# Altium PCB PCB1.PcbDoc
Units mm, origin at the board's own origin, x right, y up, seen from the top; angles counter-clockwise.
Board outline 83.57 x 47.5 mm, 2 copper layers (Top Layer, Bottom Layer); 97 components, 61 nets, 288 pads, 265 vias.
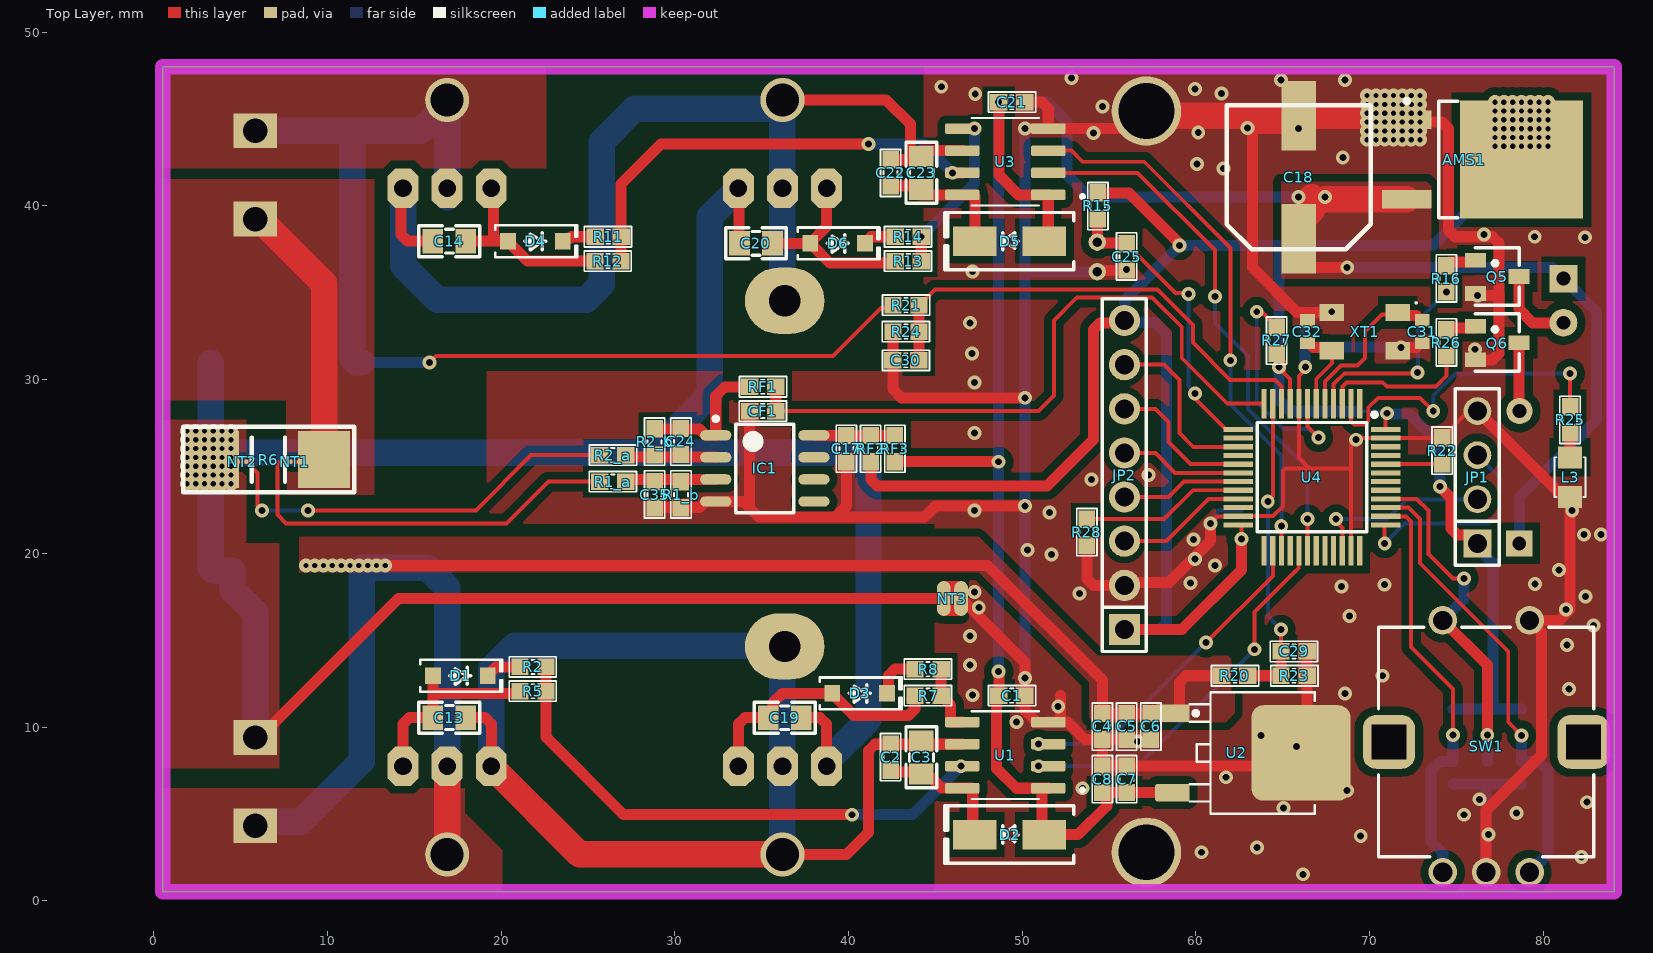
[diagram p0: Top Layer view]
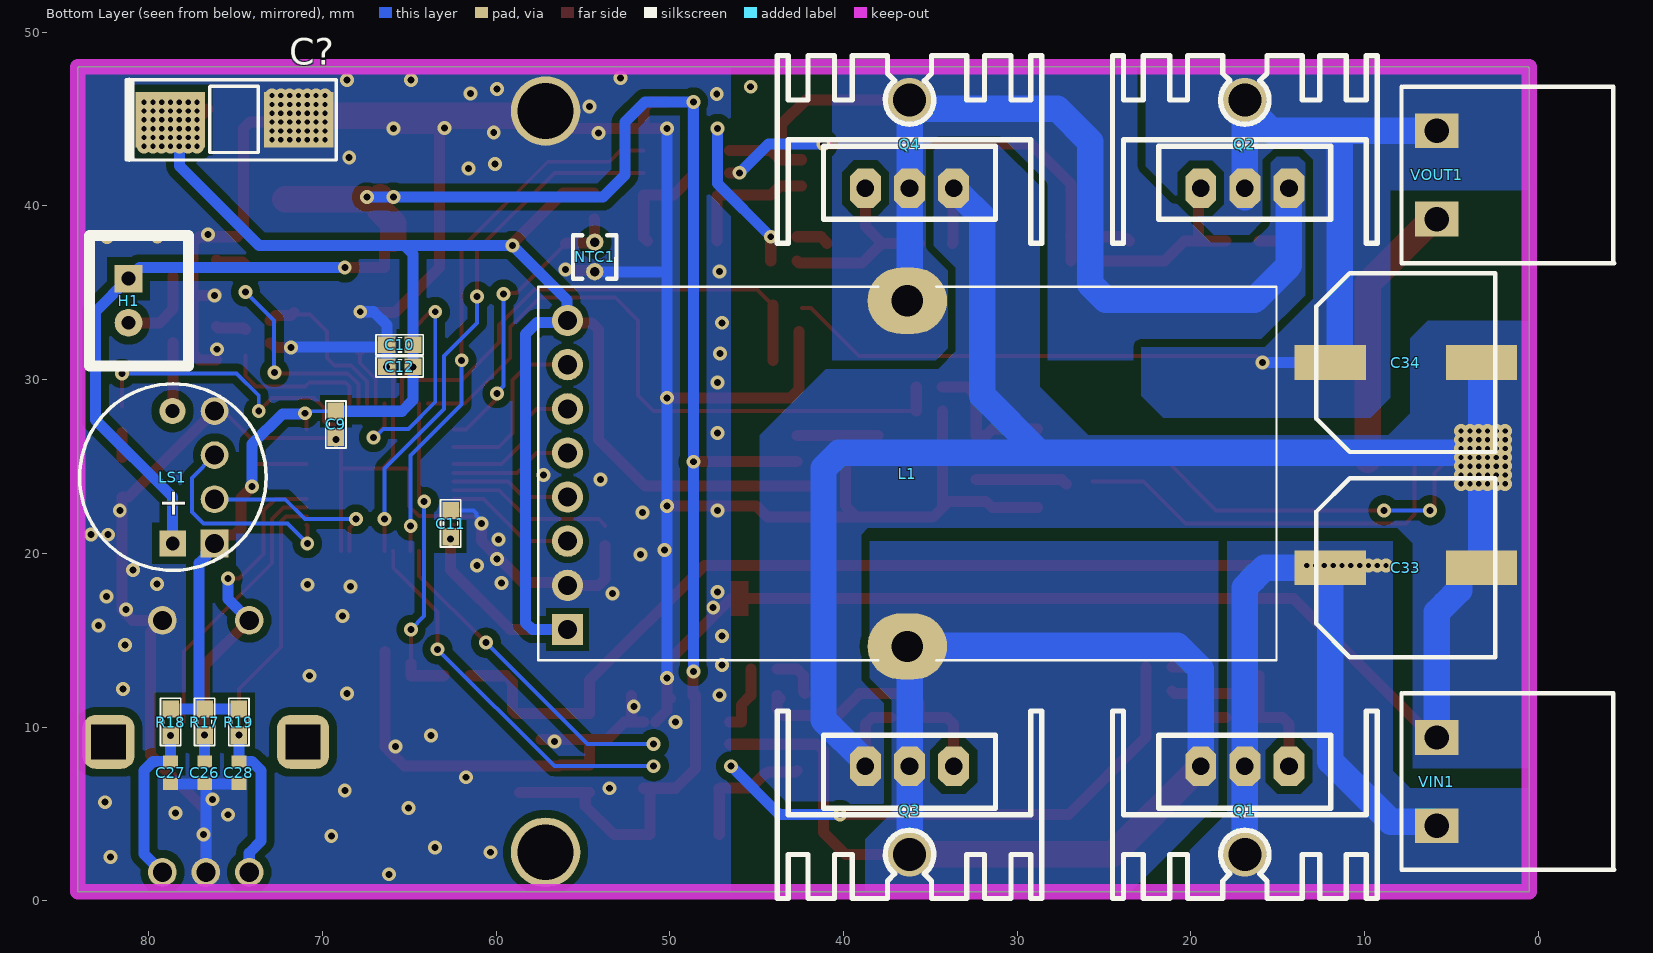
[diagram p1: Bottom Layer view, seen from below]

## Layer stack, top to bottom
Top Solder: solder mask 0.0102, Solder Resist, Dk 3.5
Top Layer: signal copper 0.0356
Dielectric 1: dielectric 0.32, FR-4, Dk 4.8
Bottom Layer: signal copper 0.0356
Bottom Solder: solder mask 0.0102, Solder Resist, Dk 3.5

## Board outline
0.508,0.508 0.508,48.006 84.074,48.006 84.074,0.508

## Design rules (kind name [scope] priority, off if disabled: settings)
Clearance [All] p1: gap=0.203 ignorepadtopadclearanceinfootprint=FALSE
PlaneConnect [All] p1: planeconnectstyle=Direct reliefexpansion=0.508 reliefentries=4 reliefconductorwidth=0.254 reliefairgap=0.254
PolygonConnect [All] p1: connectstyle=Direct reliefconductorwidth=0.254 reliefentries=4 polygonreliefangle="90 Angle" airgapwidth=0.254
RoomDefinition Sheet2 [InComponentClass('Sheet2')] p1: confinementstyle=ConfineIn formatcopy=TRUE lockcomponents=FALSE outline -57.785,-160.655 -6.985,-160.655 -6.985,-135.255 -57.785,-135.255
RoutingVias [All] p1: holewidth=0.4 width=0.8 viastyle="Through Hole" minholewidth=0.4 minwidth=0.8 maxholewidth=0.4 maxwidth=0.8
SolderMaskExpansion [All] p1: expansion=0.102 istentingtop=FALSE
Width [All] p1: maxlimit=1.524 minlimit=0.229 preferedwidth=0.635
29 further rules are at their usual default settings.

## Components (designator, comment, footprint, x,y, rotation, side; value= is the part's Value field where it differs from the comment)
AMS1 "AMS1117" "TO 252" 70.456,39.081 r0 top
C1 "104" "tu 0603" 49.403,11.811 r0 top
C2 "104" "tu 0603" 42.418,8.255 r90 top
C3 "104" "tu 0805" 44.196,8.255 r270 top
C4 "104" "tu 0603" 54.61,10.033 r270 top
C5 "104" "tu 0603" 56.007,10.033 r270 top
C6 "104" "tu 0603" 57.404,10.033 r270 top
C7 "104" "tu 0603" 56.007,6.985 r90 top
C8 "104" "tu 0603" 54.61,6.985 r90 top
C9 "104" "tu 0603" 69.215,27.432 r270 bottom
C10 "104" "tu 0603" 65.532,32.004 r0 bottom
C11 "104" "tu 0603" 62.611,21.717 r90 bottom
C12 "104" "tu 0603" 65.532,30.734 r0 bottom
C13 "100" "tu 0805" 17.018,10.541 r180 top
C14 "100" "tu 0805" 17.018,37.97 r180 top
C17 "104" "tu 0603" 39.878,26.035 r270 top
C18 "100uF" "tu nhom 8 (f)" 65.913,41.656 r90 top
C19 "100" "tu 0805" 36.322,10.541 r0 top
C20 "100" "tu 0805" 34.671,37.846 r180 top
C21 "104" "tu 0603" 49.403,45.974 r0 top
C22 "104" "tu 0603" 42.418,41.91 r270 top
C23 "104" "tu 0805" 44.196,41.91 r270 top
C24 "100" "tu 0603" 30.353,26.441 r270 top
C25 "102" "tu 0603" 56.007,37.084 r90 top
C26 "0.1uF" CAPC1608X09L 76.772,7.366 r90 bottom
C27 "0.1uF" CAPC1608X09L 78.74,7.366 r90 bottom
C28 "0.1uF" CAPC1608X09L 74.803,7.366 r90 bottom
C29 "102" "tu 0603" 65.647,14.351 r180 top
C30 "102" "tu 0603" 43.295,31.115 r0 top
C31 "10pF" CAPC1608X09L 73.025,32.766 r90 top
C32 "10pF" CAPC1608X09L 66.421,32.766 r270 top
C33 "1000uF" "tu nhom 10 (G)" 7.62,19.177 r180 bottom
C34 "1000uF" "tu nhom 10 (G)" 7.62,30.988 r180 bottom
C35 "100" "tu 0603" 28.829,23.38 r90 top
C? "47uF" "tu tantalum smd7343" 75.057,44.958 r180 bottom
CF1 "104" "tu 0603" 35.052,28.194 r0 top
D1 "S4" "DIODE SOD-123" 17.653,12.954 r0 top
D2 "SS34" "DIODE SMA" 49.276,3.81 r180 top
D3 "S4" "DIODE SOD-123" 40.64,11.938 r0 top
D4 "S4" "DIODE SOD-123" 21.971,37.973 r0 top
D5 "SS34" "DIODE SMA" 49.276,37.973 r180 top
D6 "S4" "DIODE SOD-123" 39.37,37.846 r0 top
H1 "FAN" XH2.54M-2 81.153,35.814 r270 bottom
IC1 "LM358 SOP8" "SOP 8" 35.179,24.892 r0 top
JP1 "debug" "JP 1x4 DT" 76.2,20.574 r90 top
JP2 "lcd_1.8 inch" "JP 1x8 DT" 55.88,15.621 r90 top
L1 "ATCA-08-251M-V" IND_ATCA-08-251M-V 36.322,24.594 r90 bottom locked
L3 "LED 0805" LED-0805-Red 81.534,25.527 r270 top
LS1 "Coi Chip Speaker" "Coi Chip Speacker" 78.613,20.574 r90 bottom
NT1 "0.25mm" NetTie_0.25mm 8.374,25.273 r180 top net-tie
NT2 "0.25mm" NetTie_0.25mm 4.834,25.273 r0 top net-tie
NT3 "NetTie_2mm" NetTie_2mm 45.482,17.399 r0 top net-tie
NTC1 "10k" MF52 54.356,37.084 r90 bottom
Q1 "IRFZ44" QTO-220H3 14.351,7.747 r0 bottom locked
Q2 "IRFZ44" QTO-220H3 19.431,41.021 r180 bottom
Q3 "IRFZ44" QTO-220H3 33.655,7.747 r0 bottom locked
Q4 "IRFZ44" QTO-220H3 38.735,41.021 r180 bottom
Q5 "HF" SOT-23 77.343,35.941 r270 top value=C9014
Q6 "HF" SOT-23 77.343,32.131 r270 top value=C9014
R1_a "10K" "Tro smd 0603" 26.416,24.13 r0 top
R1_b "30K" "Tro smd 0603" 30.353,23.38 r90 top
R2 "2.2R" "Tro smd 0603" 21.832,13.462 r180 top
R2_a "10K" "Tro smd 0603" 26.428,25.654 r0 top
R2_b "30K" "Tro smd 0603" 28.829,26.416 r90 top
R5 "10R" "Tro smd 0603" 21.832,12.065 r180 top
R6 "0.01R" "tro smd 2512" 6.604,25.4 r0 top
R7 "10R" "Tro smd 0603" 44.577,11.811 r180 top
R8 "2.2R" "Tro smd 0603" 44.577,13.335 r180 top
R11 "2.2R" "Tro smd 0603" 26.162,38.227 r180 top
R12 "10R" "Tro smd 0603" 26.15,36.83 r180 top
R13 "10R" "Tro smd 0603" 43.434,36.83 r180 top
R14 "2.2R" "Tro smd 0603" 43.434,38.227 r180 top
R15 "10k" "tro smd 0603" 54.356,40.005 r270 top
R16 "4.7K" "Tro smd 0603" 74.422,35.814 r90 top
R17 "10k" "Tro smd 0603" 76.772,10.287 r90 bottom
R18 "10k" "Tro smd 0603" 78.74,10.287 r90 bottom
R19 "10k" "Tro smd 0603" 74.803,10.287 r90 bottom
R20 "10k" "tro smd 0603" 62.242,12.954 r0 top
R21 "10k" "tro smd 0603" 43.307,34.29 r0 top
R22 "10k" "Tro smd 0603" 74.168,25.896 r90 top
R23 "100k" "tro smd 0603" 65.647,12.954 r0 top
R24 "100k" "tro smd 0603" 43.307,32.766 r180 top
R25 "10k" "Tro smd 0603" 81.534,27.698 r270 top
R26 "4.7K" "Tro smd 0603" 74.422,32.131 r90 top
R27 "10k" "Tro smd 0603" 64.643,32.258 r270 top
R28 "10k" "Tro smd 0603" 53.721,21.209 r90 top
RF1 "10K" "Tro smd 0603" 35.064,29.591 r0 top
RF2 "0R" "Tro smd 0603" 41.275,26.035 r270 top
RF3 "0R" "Tro smd 0603" 42.672,26.035 r270 top
SW1 "482024764004" 482024764004 76.708,9.144 r270 top locked
U1 "IR2101S" SOIC127P600X175-8N 49.022,8.382 r180 top
U2 "78M12 SMD TO252" TO252 62.34,8.509 r270 top
U3 "IR2101S" SOIC127P600X175-8N 49.022,42.545 r180 top
U4 "STM32F103C8T6" LQFP-48_19.6_393_58X11_SMD 66.675,24.384 r270 top
VIN1 "CON 2 EDG5.08" "CON 2 2EDG5.08" 5.842,9.398 r270 bottom
VOUT1 "CON 2 EDG5.08" "CON 2 2EDG5.08" 5.842,44.323 r270 bottom
XT1 "8 MHz" DFN220P320X110-4N 69.723,32.766 r180 top

## Footprints (in the part's own frame and the unit in brackets; to place one, negate y for a bottom-side part, rotate by r counter-clockwise, add the part's x,y. Pads: shape width x height; smd on the part's side, far side on the other; paste and mask are expansions set on the pad)
482024764004 [mm]
  round 1.65 hole 1.1: 1(-7,-2.5) 2(-7,2.5) A(7.5,-2.5) B(7.5,2.5) C(7.5,0)
  rrect50% 3.1x3 hole 2 square: S1(0,5.6) S2(0,-5.6)
  silkscreen extent -6.6,-6.2 6.6,6.2, body extent -7.32,-6.81 7.8,6.81, height 20.1
CAPC1608X09L [mm]
  rect 0.7x0.85 smd: 1(-0.65,0) 2(0.65,0)
  body extent -0.85,-0.45 0.85,0.45, height 0.9
"Coi Chip Speacker" [mm]
  rect 1.5x1.5 hole 0.8: 1(0,0)
  round 1.5 hole 0.8: 2(7.62,0.013)
  silkscreen extent -1.55,-5.38 9.18,5.36, body extent -2.22,-6 13.24,6, height 4.5
"CON 2 2EDG5.08" [mm]
  rect 2x2.5 hole 1.4: 1(0,0) 2(5.08,0)
  silkscreen extent -2.54,-2.03 7.62,10.21, body extent -2.5,-1.75 7.58,10.25, height 3.15
DFN220P320X110-4N [mm]
  rect 1.4x1 smd: 1(-1.9,-1.1) 3(1.9,1.1) G(-1.9,1.1) G(1.9,-1.1)
  silkscreen extent -3,-1.7 -2.9,-1.6, body extent -2.55,-1.65 2.55,1.65, height 1.1
"DIODE SMA" [mm] "SMA"
  rect 2.5x1.7 smd: 1(-2,0) 2(2,0)
  silkscreen extent -3.68,-1.65 3.75,1.65, body extent -2.6,-1.37 2.6,1.37, height 2.4
"DIODE SOD-123" [mm] "SOD-123"
  rect 0.9x0.95 smd: 1(-1.575,0) 2(1.575,0)
  silkscreen extent -2.3,-0.92 2.41,0.92, body extent -1.86,-0.78 1.86,0.77, height 1.35
IND_ATCA-08-251M-V [mm]
  oval 3.81x4.572 hole 1.8: 1(-9.95,0) 2(9.95,0)
  silkscreen extent -10.75,-21.25 10.75,21.25, body extent -21.45,-10.75 21.45,10.75, height 21.45
"JP 1x4 DT" [mm] "4 pins, 1 row, straight, gold plating"
  rect 1.6x1.6 hole 1.1: 1(0,0)
  round 1.6 hole 1.1: 2(2.54,0) 3(5.08,0) 4(7.62,0)
  silkscreen extent -1.27,-1.27 8.89,1.27, body extent -1.27,-1.27 8.89,1.27, height 8.54
"JP 1x8 DT" [mm] "8 pins, 1 row, straight, gold plating"
  rect 1.8x1.8 hole 1.1: 1(0,0)
  round 1.8 hole 1.1: 2(2.54,0) 3(5.08,0) 4(7.62,0) 5(10.16,0) 6(12.7,0) 7(15.24,0) 8(17.78,0)
  silkscreen extent -1.27,-1.27 19.05,1.27, body extent -1.27,-1.27 19.05,1.27, height 8.54
LED-0805-Red [mil]
  rect 50x55 smd: 1(0,0) 2(90,0)
  silkscreen extent 0,-35 90,35, body extent 5,-25 85,25, height 43
LQFP-48_19.6_393_58X11_SMD [mm] "48LQFP"
  rect 1.7x0.3 smd mask+0.076: 1(-4.238,2.75) 2(-4.238,2.25) 3(-4.238,1.75) 4(-4.238,1.25) 5(-4.238,0.75) 6(-4.238,0.25) 7(-4.238,-0.25) 8(-4.238,-0.75) 9(-4.238,-1.25) 10(-4.238,-1.75) 11(-4.238,-2.25) 12(-4.238,-2.75) 25(4.238,-2.75) 26(4.238,-2.25) 27(4.238,-1.75) 28(4.238,-1.25) 29(4.238,-0.75) 30(4.238,-0.25) 31(4.238,0.25) 32(4.238,0.75) 33(4.238,1.25) 34(4.238,1.75) 35(4.238,2.25) 36(4.238,2.75)
  rect 0.3x1.7 smd mask+0.076: 13(-2.75,-4.238) 14(-2.25,-4.238) 15(-1.75,-4.238) 16(-1.25,-4.238) 17(-0.75,-4.238) 18(-0.25,-4.238) 19(0.25,-4.238) 20(0.75,-4.238) 21(1.25,-4.238) 22(1.75,-4.238) 23(2.25,-4.238) 24(2.75,-4.238) 37(2.75,4.238) 38(2.25,4.238) 39(1.75,4.238) 40(1.25,4.238) 41(0.75,4.238) 42(0.25,4.238) 43(-0.25,4.238) 44(-0.75,4.238) 45(-1.25,4.238) 46(-1.75,4.238) 47(-2.25,4.238) 48(-2.75,4.238)
  silkscreen extent -3.72,-3.15 3.15,3.73, body extent -4.5,-4.5 4.5,4.5, height 1.7
MF52 [mm]
  round 1 hole 0.55: 1(-0.869,-0.039) 2(0.831,-0.039)
  silkscreen extent -1.27,-1.29 1.23,1.21, body extent -1.24,-1.24 1.26,2.56, height 5.45
NetTie_0.25mm [mm]
  round 0.25 smd paste-2 mask+0.102: 1(0,0) 2(0.5,0)
  Top Layer region: 0,0.125 0.5,0.125 0.5,-0.125 0,-0.125
NetTie_2mm [mm]
  oval 0.8x2 smd paste-2 mask+0.102: 1(0,0) 2(1,0)
  Top Layer region: 0,1 1,1 1,-1 0,-1
QTO-220H3 [mil] "TO-220 1-2-3"
  oct 70x90 hole 40: 1(0,0) 2(100,0) 3(200,0)
  round 100 hole 75: 2(100,200)
  silkscreen extent -200,-125 400,300, body extent -190,-102 392,323, height 984
SOIC127P600X175-8N [mm]
  rrect25% 1.97x0.6 smd: 1(-2.475,1.905) 2(-2.475,0.635) 3(-2.475,-0.635) 4(-2.475,-1.905) 5(2.475,-1.905) 6(2.475,-0.635) 7(2.475,0.635) 8(2.475,1.905)
  silkscreen extent -4.54,-2.52 1.95,2.53, body extent -3,-2.5 3,2.5, height 1.75
"SOP 8" [mm] "SOIC, 8-Leads, Body 4.9x3.9mm, Pitch 1.27mm, IPC High Density"
  oval 1.8x0.6 smd: 1(-2.825,1.905) 2(-2.825,0.635) 3(-2.825,-0.635) 4(-2.825,-1.905) 5(2.825,-1.905) 6(2.825,-0.635) 7(2.825,0.635) 8(2.825,1.905)
  silkscreen extent -2.95,-2.55 1.68,2.98, body extent -2.99,-2.45 3,2.45, height 1.6
SOT-23 [mm] "SOT 23 _ 1-3-2"
  rect 0.85x1.2 smd: 1(-0.94,-1.245) 2(0.985,-1.25) 3(0.005,1.25)
  silkscreen extent -1.65,-1.27 1.65,1.27, body extent -1.47,-1.33 1.53,1.17, height 1.06
TO252 [mm] "TO252"
  round 0.5 on Mech15: 0(0,0)
  rrect25% 1x2 smd: 1(-2.285,-3.7) 3(2.285,-3.7)
  rrect25% 5.5x5.7 smd: 2(0,3.7)
  silkscreen extent -3.5,-2.7 3.5,4.5, body extent -3.3,-3.95 3.3,5.76, height 2.31
"TO 252" [mm]
  rect 2.85x1.05 smd: 1(1.684,5.881) 3(1.684,1.301)
  rect 7.1x6.8 smd: 2(8.284,3.591)
  silkscreen extent 1.56,0.24 4.61,7.08, body extent 1.25,0.35 10.92,6.89, height 2.29
"Tro smd 0603" [mm] "Chip Capacitor, 2-Leads, Body 1,60x0,80mm, IPC Medium Density"
  rect 1x0.95 smd mask+0.076: 1(-0.75,0) 2(0.75,0)
  silkscreen extent -1.35,-0.58 1.37,0.58, body extent -0.82,-0.42 0.82,0.43, height 0.44
"tro smd 0603" [mm] "Chip Capacitor, 2-Leads, Body 1,60x0,80mm, IPC Medium Density"
  rect 1x0.95 smd mask+0.076: 1(-0.75,0) 2(0.75,0)
  silkscreen extent -1.35,-0.58 1.37,0.58, body extent -0.82,-0.42 0.82,0.43, height 0.44
"tro smd 2512" [mm]
  rect 3x3.3 smd: 1(-3.2,0) 2(3.2,0)
  silkscreen extent -4.9,-1.88 4.93,1.88, body extent -3.12,-1.57 3.18,1.58, height 0.82
"tu 0603" [mm] "Chip Capacitor, 2-Leads, Body 1,60x0,80mm, IPC Medium Density"
  rect 1x0.95 smd mask+0.076: 1(-0.75,0) 2(0.75,0)
  silkscreen extent -1.35,-0.58 1.37,0.58, body extent -0.8,-0.4 0.8,0.4, height 0.9
"tu 0805" [mm] "Compoment SMD 80x50mil"
  rect 1.2x1.4 smd: 1(-0.946,-0.003) 2(0.954,-0.003)
  silkscreen extent -1.75,-0.89 1.75,0.89, body extent -1.01,-0.64 1.01,0.63, height 0.61
"tu nhom 8 (f)" [mm]
  rect 4x2 smd: 1(-3.55,0) 2(3.55,0)
  silkscreen extent -4.15,-4.15 4.15,4.15, body extent -4.85,-4.25 4.85,4.25, height 10.5
"tu nhom 10 (G)" [mm]
  rect 4.1x2 smd: 1(-4.35,0) 2(4.35,0)
  silkscreen extent -5.15,-5.15 5.15,5.15, body extent -5.9,-5.25 5.9,5.25, height 10.5
"tu tantalum smd7343" [mm]
  rect 4x3.2 smd: 1(-3.7,0) 2(3.7,0)
  silkscreen extent -6.23,-2.31 5.85,2.31, body extent -3.75,-2.33 3.85,2.27, height 3.99
XH2.54M-2 [mm]
  rect 1.6x1.6 hole 0.8: 1(0,0)
  round 1.6 hole 0.8: 2(2.54,0)
  silkscreen extent -2.48,-2.26 5.02,3.46, body extent -2.48,-2.26 5.02,3.48, height 6.91

## Part data
C1 C2 C4 C5 C6 C7 C8 C9 C10 C11 C12 C21 C22: library part "Tu 0603 101 50V 10%", "Dán", Chung_Loai=Dán, Don_Vi=Con, Ma_Hang=MH004565, So_Chan=2, Ten_Linh_Kien="Tụ 0603 101-0.1nF 10% 50V"
C3 C23: library part "Tu 0805 101 50V 20%", "Dán", Chung_Loai=Dán, Don_Vi=Con, Ma_Hang=MH002806, So_Chan=2, Ten_Linh_Kien="Tụ 0805 101-0.1nF 50V 20%"
C13 C14 C19 C20: library part "Tu 0805 104 50V 10%", "Dán", Chung_Loai=Dán, Don_Vi=Con, Ma_Hang=MH004551, So_Chan=2, Ten_Linh_Kien="Tụ 0805 104-100nF 10% 50V"
C17 C24 C35 CF1: library part "Tu 0603 106 16V 20%", "Dán", Chung_Loai=Dán, Don_Vi=Con, Ma_Hang=MH004848, So_Chan=2, Ten_Linh_Kien="Tụ 0603-10uF 20% 16V"
C18: library part "Tu Nhom 100uF 50V", "Dán", Chung_Loai=Dán, Don_Vi=Con, Ma_Hang=MH002223, So_Chan=2, Ten_Linh_Kien="Tụ Nhôm 100uF 50V 8x10.2MM"
C25 C29 C30: library part "Tu 0603 104 50V 10%", "Dán", Chung_Loai=Dán, Don_Vi=Con, Ma_Hang=MH004568, So_Chan=2, Ten_Linh_Kien="Tụ 0603 104-100nF 10% 50V"
C26 C27 C28: library part GRM188R71H104KA93D, "CAP CER 0.1UF 50V X7R 0603", Manufacturer="Murata Electronics North America", Operating Temperature="-55°C ~ 125°C", Package / Case="0603 (1608 Metric)", Ratings=-, Supplier Part Number 1=490-1519-2-ND, Temperature Coefficient=X7R, Tolerance=±10%, Voltage - Rated=50V, Applications="General Purpose", Capacitance=0.1uF, Category=Capacitors, ComponentLink1Description=http://www.murata.com/~/media/webrenewal/support/library/catalog/products/capacitor/mlcc/c02e.ashx?la=en-us, ComponentLink1URL=http://www.murata.com/~/media/webrenewal/support/library/catalog/products/capacitor/mlcc/c02e.ashx?la=en-us, Features=-, Height - Seated (Max)=-, Lead Spacing=-, Lead Style=-, Manufacturer Part Number=GRM188R71H104KA93D, Mounting Type="Surface Mount, MLCC", Packaging="Tape & Reel (TR)", Part Status=Active, Pricing 1="4000=0.01822, 8000=0.01663, 12000=0.01584 (USD)", Pricing 2="1=0.12, 10=0.084, 100=0.0396, 500=0.02778, 1000=0.023 (USD)", RoHS="RoHS Compliant", Size / Dimension="0.063\" L x 0.032\" W (1.60mm x 0.80mm)", Stock=19812000, Supplier 1=Digi-Key, Supplier 2=Digi-Key, Supplier Part Number 2=490-1519-1-ND, Thickness (Max)="0.035\" (0.90mm)"
C31 C32: library part GRM188R71H104KA93D, "CAP CER 0.1UF 50V X7R 0603", Capacitance=0.1uF, Manufacturer="Murata Electronics North America", Operating Temperature="-55°C ~ 125°C", Package / Case="0603 (1608 Metric)", Ratings=-, Supplier Part Number 1=490-1519-2-ND, Temperature Coefficient=X7R, Tolerance=±10%, Voltage - Rated=50V, Applications="General Purpose", Category=Capacitors, ComponentLink1Description=http://www.murata.com/~/media/webrenewal/support/library/catalog/products/capacitor/mlcc/c02e.ashx?la=en-us, ComponentLink1URL=http://www.murata.com/~/media/webrenewal/support/library/catalog/products/capacitor/mlcc/c02e.ashx?la=en-us, Features=-, Height - Seated (Max)=-, Lead Spacing=-, Lead Style=-, Manufacturer Part Number=GRM188R71H104KA93D, Mounting Type="Surface Mount, MLCC", Packaging="Tape & Reel (TR)", Part Status=Active, Pricing 1="4000=0.01822, 8000=0.01663, 12000=0.01584 (USD)", Pricing 2="1=0.12, 10=0.084, 100=0.0396, 500=0.02778, 1000=0.023 (USD)", RoHS="RoHS Compliant", Size / Dimension="0.063\" L x 0.032\" W (1.60mm x 0.80mm)", Stock=19812000, Supplier 1=Digi-Key, Supplier 2=Digi-Key, Supplier Part Number 2=490-1519-1-ND, Thickness (Max)="0.035\" (0.90mm)"
C33 C34: library part "Tu Nhom 1000uF 10V", "Dán", Chung_Loai=Dán, Don_Vi=Con, Ma_Hang=MH007515, So_Chan=2, Ten_Linh_Kien="Tụ Nhôm 1000uF 10V"
C?: library part "Tu tantalum 47uF 25V SMD7343", "Dán", Chung_Loai=Dán, Don_Vi=Con, Ma_Hang=MH002162, So_Chan=2, Ten_Linh_Kien="Tụ tantalum 476E-47uF 25V SMD7343"
D1 D3 D4 D6: library part "Diode S4", "Dán", Chung_Loai=Dán, Don_Vi=Con, Ma_Hang=MH005519, Ten_Linh_Kien="Diode S4 SOD123 ( 1N5819 SOD123)"
D2 D5: library part "Diode SS34 ( 1N5822 )", "Dán", Chung_Loai=Dán, Don_Vi=Con, Ma_Hang=MH002104, Ten_Linh_Kien="Diode SS34 3A 40V SMA ( 1N5822 SS34A)"
H1: library part "Header 2P 2.54 Duc Thang", "Cắm", Chung_Loai=Cắm, Don_Vi=Con, Ma_Hang=MH001283, Ten_Linh_Kien="Header 2P XH2.54-2P Đực Thẳng"
IC1: "Dán", Chung_Loai=Dán, Don_Vi=Con, Ma_Hang=MH000609, Ten_Linh_Kien="LM358 SOP8"
JP1: library part "JP 1x4 2.54 Duc Thang", "Cắm", Chung_Loai=Cắm, Don_Vi=Con, Ma_Hang=MH000903, Ten_Linh_Kien="Jump Đơn Đực 2.54MM 1x40P Thẳng 11MM"
JP2: library part "JP 1x8 2.54 Duc Thang", "Cắm", Chung_Loai=Cắm, Don_Vi=Con, Ma_Hang=MH000903, Ten_Linh_Kien="Jump Đơn Đực 2.54MM 1x40P Thẳng 11MM"
L1: "250 ÂµH Unshielded Toroidal Inductor 10 A 27mOhm Max Radial, Vertical (Open)", Package=Package, Check_prices=https://www.snapeda.com/parts/ATCA-08-251M-V/Abracon/view-part/?ref=eda, MF="Abracon LLC", MP=ATCA-08-251M-V, SnapEDA_Link=https://www.snapeda.com/parts/ATCA-08-251M-V/Abracon/view-part/?ref=snap
L3: library part "LED 0805 Do", "Dán", Chung_Loai=Dán, Don_Vi=Con, Ma_Hang=MH000897, Ten_Linh_Kien="LED 0805 Màu Đỏ (Red)"
LS1: "Còi chip"
NT1 NT2: library part NetTie_0.25mm
NTC1: library part NCP15XH103F03RC, "THERMISTOR 10K OHM NTC 0402 SMD"
Q1 Q2 Q3 Q4: "HEXFET N-Channel Power MOSFET"
Q5 Q6: library part "Trans C1815 HF SMD", "SOT-23"
R1_a R1_b R2 R2_a R2_b R5 R7 R8 R11 R12 R13 R14 R16 R17 R18 R19 R22 R25 R26 R27 R28 RF1 RF2 RF3: library part "Tro 0603 5% 10R", "Dán", Chung_Loai=Dán, Don_Vi=Con, Ma_Hang=MH006317, So_Chan=2, Ten_Linh_Kien="Trở 0603 5% 10R"
R6: library part "Tro 2512 1% 0.01R", "Dán", Chung_Loai=Dán, Don_Vi=Con, Ma_Hang=MH004912, So_Chan=2, Ten_Linh_Kien="Trở 2512 1% R010-0.01R 1W"
R15 R20 R21 R23 R24: library part "Tro 0603 5% 10k", "Dán", Chung_Loai=Dán, Don_Vi=Con, Ma_Hang=MH006316, So_Chan=2, Ten_Linh_Kien="Trở 0603 5% 10k"
SW1: "WS-ENTV Mechanical Incremental Encoder Switch, Plastic Shaft without bushing, 24Pulse/360°, 24positi", Insulation Resistance=100MΩ, Manufacturer="Wurth Elektronik", Operating Temperature Max=85°C, Operating Temperature Min=-40°C, Rated Current=10mA, Category="Encoder Switches", ComponentLink1Description="Website Link", ComponentLink1URL=https://www.we-online.com/redexpert/article/482024764004?ad, ComponentLink2Description="Datasheet Link", ComponentLink2URL=https://www.we-online.com/redexpert/spec/482024764004?ad, Detent=24positions, Electrical Life Encoder=30000Cycles, Electrical Life Switch=20000Cycles, Height=20mm, Length=13.2mm, Manufacturer Part Number=482024764004, Match Code=WS-ENTV, Mount="Through Hole", Operation Force=300g, Packaging=Tray, Resolution=24Pulse/360°, Width=12.4mm
U1 U3: "Half-Bridge Gate Driver IC Non-Inverting 8-SOIC", Package="SOIC-8 Infineon", Check_prices=https://www.snapeda.com/parts/IR2101S/Infineon/view-part/?ref=eda, MF="Infineon Technologies", MP=IR2101S, SnapEDA_Link=https://www.snapeda.com/parts/IR2101S/Infineon/view-part/?ref=snap
U2: library part "78M05 SMD TO252", "Dán", Chung_Loai=Dán, Don_Vi=Con, Ma_Hang=MH001917, Ten_Linh_Kien="78M05 TO252"
U4: library part IC_STM32F103C8T6, "ARM® Cortex®-M3 STM32F1 Microcontroller IC 32-Bit 72MHz 64KB (64K x 8) FLASH 48-LQFP (7x7)", Alternate Part Number-1=NA, Case/Package=LQFP48, Manufacturer=STMicroelectronics, Manufacturer Part Number=STM32F103C8T6, Supplier Part Number-1=STM32F103C8T6, Supplier-1=LCSC
VIN1 VOUT1: "Cắm", Chung_Loai=Cắm, Don_Vi=Con, Ma_Hang=MH000759, Ten_Linh_Kien="CON 2 2EDG5.08-2P 5.08MM ( Xanh Cong)"
XT1: library part ABM3B-8.000MHZ-10-1-U-T, "Crystal 8MHz ±10ppm 10pF 200 Ohm -10°C ~ 60°C Surface Mount 4-SMD, No Lead (DFN, LCC)", Frequency Stability=±10ppm, Load Capacitance=10pF, Manufacturer="Abracon LLC", Operating Mode=Fundamental, Operating Temperature="-10°C ~ 60°C", Package / Case="4-SMD, No Lead", Ratings=-, Supplier Part Number 1=535-9721-1-ND, Category="Crystals, Oscillators, Resonators", ComponentLink1Description=http://www.abracon.com/Resonators/abm3b.pdf, ComponentLink1URL=http://www.abracon.com/Resonators/abm3b.pdf, Frequency Tolerance=±10ppm, Height - Seated (Max)="0.043\" (1.10mm)", Manufacturer Part Number=ABM3B-8.000MHZ-10-1-U-T, Mounting Type="Surface Mount", Packaging="Cut Tape (CT)", Part Status=Active, Pricing 1="1=0.69, 10=0.578, 50=0.5198, 100=0.462, 500=0.4389 (USD)", Pricing 2="1000=0.336, 3000=0.315, 5000=0.3045, 10000=0.294 (USD)", RoHS="RoHS Compliant", Size / Dimension="0.197\" L x 0.126\" W (5.00mm x 3.20mm)", Stock=35437, Supplier 1=Digi-Key, Supplier 2=Digi-Key, Supplier Part Number 2=535-9721-2-ND, Type="MHz Crystal"

## Free pads (board coordinates)
  round 4 hole 3.2: 5(57.15,2.794) 5(57.15,45.466)

## Via types
v1: diameter 0.8, hole 0.3, Top Layer to Bottom Layer, tented both sides, 136 vias
v2: diameter 0.8, hole 0.4, Top Layer to Bottom Layer, tented both sides, 129 vias

## Nets (pads, with @x,y where several pads share a name; then routed paths per layer and width w, separated by ;. In a path a pad name is that pad's centre, name@x,y a point inside that pad or via, vN(x,y) a via of type N, cw(c..) or ccw(c..) an arc to the next point about the centre after c; other vN are vias at no path point)
3v3: AMS1.2 C9.1 C10.1 C11.1 C12.1 C?.1 JP1.1 JP2.1 JP2.8 R15.1 R17.2 R18.2 R19.2 R27.2 RF2.2 U4.9 U4.24 U4.48 | length 138.4
  Top Layer w0.229: U4.24 62.575,21.634 62.611,21.598 v2(62.611,20.828) ; R27.2@65.081,31.045 65.081,30.373 65.425,30.029 U4.9 ; U4.48 v2@70.913,28.013
  Top Layer w0.635: RF2.2 41.29,25.27 41.29,24.248 41.662,23.876 51.435,23.876 54.102,26.543 54.102,32.893 54.474,33.265 55.744,33.265 JP2.8 ; R15.1 56.146,40.755 59.023,37.878 59.023,37.751 v2(59.055,37.719) ; JP2.1@55.642,15.859 JP2.1 59.182,15.621 62.611,19.05 v2(62.611,20.828) ; v2(74.041,23.857) 74.041,23.812 74.676,23.177 74.676,21.428 75.048,21.057 75.717,21.057 JP1.1 ; AMS1.2@76.581,45.593 v1(77.216,44.958)
  Bottom Layer w0.229: C9.1 70.878,28.182 v2(70.993,28.067)
  Bottom Layer w0.635: JP2.1 57.912,15.621 58.293,16.002 58.293,32.639 57.633,33.299 55.982,33.299 JP2.8 55.913,33.434 55.913,34.577 v2@59.023,37.687 ; v2(59.055,37.719) 65.278,37.719 ; C9.1 65.417,28.182 64.782,28.817 C12.1 64.782,37.223 65.278,37.719 ; v2(70.993,28.067) 71.025,28.035 72.295,28.035 74.041,26.289 v2(74.041,23.857) ; R19.2 R17.2 ; JP1.1 76.683,20.091 76.683,19.837 77.089,19.431 77.089,11.355 R17.2 ; v1(77.216,44.958) C?.1 78.22,44.422 78.22,42.302 73.637,37.719 65.278,37.719 ; R18.2 R17.2
  other v1: 77.216,43.434 77.724,43.434 78.232,43.434 78.74,43.434 79.248,43.434 79.756,43.434 80.264,43.434 77.216,43.942 77.724,43.942 78.232,43.942 78.74,43.942 79.248,43.942 79.756,43.942 80.264,43.942 77.216,44.45 77.724,44.45 78.232,44.45 78.74,44.45 79.248,44.45 79.756,44.45 80.264,44.45 77.724,44.958 78.232,44.958 78.74,44.958 79.248,44.958 79.756,44.958 80.264,44.958 77.216,45.466 77.724,45.466 78.232,45.466 78.74,45.466 79.248,45.466 79.756,45.466 80.264,45.466 77.216,45.974 77.724,45.974 78.232,45.974 78.74,45.974 79.248,45.974 79.756,45.974 80.264,45.974
  other v2: 64.77,30.734
+12: AMS1.3 C1.1 C7.1 C8.1 C18.1 C21.1 D2.1 D5.1 H1.1 LS1.1 RF3.2 U1.1 U2.3 U3.1 | length 134.9
  Top Layer w0.635: RF3.2 48.629,25.285 v2(48.641,25.273) ; C1.1@48.514,11.857 48.514,7.62 49.657,6.477 U1.1@51.167,6.477 ; v2(48.641,13.208) 48.653,13.196 C1.1 ; C21.1 48.653,41.771 49.784,40.64 U3.1 51.497,38.194 D5.1 ; D2.1@51.149,3.81 51.149,6.459 U1.1@51.167,6.477 ; D2.1 53.213,3.81 54.864,5.461 C8.1@54.864,6.235 ; U1.1 U1.1@51.167,6.477 ; C8.1 C8.1@54.864,6.235 ; U2.3 54.875,6.224 C8.1@54.864,6.235 ; C18.1 66.421,37.598 66.421,36.449 v2(68.707,36.449)
  Top Layer w1.524: C18.1 65.913,38.989 66.675,39.751 66.675,40.513 ; v2@67.437,40.382 AMS1.3
  Bottom Layer w0.635: v2(48.641,13.208) v2(48.641,25.273) v2(48.641,45.974) 51.435,45.974 52.578,44.831 52.578,41.783 53.848,40.513 v2(65.913,40.513) v2(67.437,40.513) ; v2(68.707,36.449) 80.518,36.449 H1.1 83.058,33.909 83.058,27.686 78.613,23.241 LS1.1
A0: JP2.5 U4.18 | length 7
  Top Layer w0.229: JP2.5 57.658,25.781 58.805,24.634 U4.18
buzzer: R26.1 U4.3 | length 8.6
  Top Layer w0.229: U4.3 68.432,28.629 68.432,29.614 68.663,29.845 70.753,29.845 70.988,29.61 73.806,29.61 74.422,30.226 R26.1
CLK: JP1.3 U4.37 | length 12.3
  Top Layer w0.229: v2(70.866,20.574) 70.866,21.598 70.902,21.634 U4.37
  Bottom Layer w0.229: v2(70.866,20.574) 72.009,21.717 76.835,21.717 77.502,22.384 77.502,24.352 JP1.3
CS: JP2.3 U4.21 | length 7.6
  Top Layer w0.229: JP2.3 58.293,20.701 60.726,23.134 U4.21
current_sense: CF1.2 RF1.2 U4.12 | length 38.3
  Top Layer w0.229: CF1.2 50.927,28.194 51.816,29.083 51.816,33.401 53.137,34.722 57.48,34.722 59.182,33.02 59.182,31.242 61.802,28.622 U4.12
  Top Layer w0.635: CF1.2 35.808,28.2 35.808,29.585 RF1.2
enc_a: C28.2 R19.1 SW1.A U4.38 | length 24
  Top Layer w0.229: U4.38 71.677,22.134 71.684,22.127 72.096,22.127 72.39,21.832 72.39,14.605 74.803,12.192 v2(74.803,9.537)
  Bottom Layer w0.635: SW1.A 74.208,2.754 73.533,3.429 73.533,7.493 74.056,8.016 C28.2 v2(74.803,9.537)
enc_b: C27.2 R18.1 SW1.B U4.39 | length 26.7
  Top Layer w0.229: U4.39 72.235,22.634 72.898,21.971 72.898,19.431 77.978,14.351 77.978,10.287 v2(78.74,9.525)
  Bottom Layer w0.229: v2(78.74,9.525) R18.1
  Bottom Layer w0.635: v2(78.74,9.525) C27.2 79.741,8.016 80.264,7.493 80.264,2.7 SW1.B
enc_c: C26.2 R17.1 SW1.1 U4.40 | length 20
  Top Layer w0.229: U4.40 72.706,23.134 73.381,22.459 73.381,19.964 74.803,18.542 75.419,18.542 v2(75.437,18.56)
  Top Layer w0.635: SW1.1 76.772,13.581 v2(76.772,9.537)
  Bottom Layer w0.635: SW1.1 75.437,17.373 v2(75.437,18.56) ; C26.2 v2(76.772,9.537)
fan: R16.1 U4.4 | length 11.6
  Top Layer w0.229: U4.4 67.925,29.754 68.537,30.366 72.754,30.366 v2(72.754,30.409)
  Bottom Layer w0.229: v2(72.754,30.409) 72.771,30.409 72.771,33.401 v2(74.422,35.052)
GND: AMS1.1 C1.2 C4.2 C5.2 C6.2 C7.2 C8.2 C9.2 C10.2 C11.2 C12.2 C17.2 C18.2 C21.2 C25.1 C26.1 C27.1 C28.1 C29.1 C30.1 C31.1 C32.1 C35.1 C?.2 CF1.1 IC1.4 JP1.4 JP2.2 L3.2 NT3.2 NTC1.1 pad.5 Q5.2 Q6.2 R1_b.1 R22.2 R23.2 R24.2 R28.1 SW1.2 SW1.C U1.4 U2.2 U3.4 U4.8 U4.23 U4.35 U4.47 XT1.G | length 275.8
  Top Layer w0.229: v2(60.833,21.717) 61.244,22.127 62.43,22.127 U4.23 62.444,22.141 64.432,22.141 65.024,22.733 65.024,24.758 65.158,24.892 66.548,24.892 ; v2(66.294,30.734) 66.294,30.579 65.925,30.21 U4.8 65.925,25.515 66.548,24.892 ; U4.35 68.925,24.892 ; v2@68.925,26.38 68.925,24.892 ; v2@69.215,26.634 U4.47 74.156,26.634 R22.2 74.168,26.671 75.429,27.932 75.938,27.932 JP1.4 ; 66.548,24.892 68.925,24.892
  Top Layer w0.635: C35.1 R1_b.1 31.432,22.63 31.789,22.987 IC1.4 33.942,22.987 34.302,22.627 ; CF1.1 34.302,22.627 ; C17.2 39.878,22.733 39.243,22.098 ; R24.2 42.551,32.76 42.551,31.121 C30.1 42.545,29.464 43.053,28.956 v2(50.165,28.956) ; NT3.2 50.153,13.728 C1.2 50.165,11.823 v2(50.165,12.827) ; C1.2@49.971,11.654 50.171,11.654 50.171,10.963 U1.4@50.829,10.305 ; C21.2 51.125,45.974 51.497,45.602 U3.4 ; v2(50.165,22.733) 44.999,22.733 44.364,22.098 39.243,22.098 ; v2(50.165,44.45) U3.4 ; U1.4 U1.4@52.147,10.287 ; 52.197,11.811 52.197,10.337 U1.4@52.147,10.287 ; R28.1 53.721,18.533 54.093,18.161 JP2.2 56.04,18.321 58.453,18.321 60.833,20.701 v2(60.833,21.717) ; NTC1.1 54.377,36.275 55.948,36.275 v2(56.007,36.334) ; pad.5@57.15,45.466 56.134,44.45 U3.4 ; C6.2 C5.2 C4.2 ; v2(65.913,44.45) 63.246,44.45 63.246,36.449 65.829,33.866 67.775,33.866 v2(67.818,33.909) ; C29.1 R23.2 66.397,8.866 U2.2 65.278,7.747 56.388,7.747 56.312,7.823 54.61,7.823 C4.2 ; v2(71.806,31.849) 72.682,31.849 72.95,32.116 C31.1 ; AMS1.1 AMS1.1@73.04,44.962 ; v1(72.898,44.831) 74.177,44.831 74.549,44.459 74.549,38.599 74.921,38.227 77.075,38.227 77.447,37.855 77.447,34.584 ; Q6.2 77.075,31.146 77.447,31.517 77.447,34.584 ; Q5.2 v2(76.2,34.848) 77.182,34.848 77.447,34.584 ; JP1.4 81.153,23.241 L3.2 81.534,16.764 80.914,16.144 SW1.2 79.883,15.469 79.883,8.382 76.708,5.207 SW1.C ; 34.302,22.627 34.831,22.098 39.243,22.098 ; U1.4@52.147,10.287 52.607,10.287 52.861,10.033 53.611,9.283 C4.2
  Top Layer w1.524: pad.5@57.15,45.466 57.41,45.206 C18.2 71.47,45.206 AMS1.1@71.477,45.199
  Bottom Layer w0.229: v2(60.833,21.717) 60.833,21.872 61.134,22.172 61.134,22.305 61.295,22.467 C11.2
  Bottom Layer w0.635: v2(50.165,12.827) v2(50.165,22.733) v2(50.165,28.956) 50.165,36.195 ; v2(50.165,44.45) 50.165,36.195 ; NTC1.1 54.297,36.195 50.165,36.195 ; v2(66.294,30.734) C12.2 C10.2 ; v2(67.818,33.909) 67.056,33.909 66.282,33.135 C10.2 ; v2(71.806,31.849) 71.774,31.88 66.406,31.88 C10.2 ; C28.1 C26.1 ; SW1.C 76.708,6.652 C26.1 ; C27.1 C26.1
  other v1: 69.85,43.815 70.358,43.815 70.866,43.815 71.374,43.815 71.882,43.815 72.39,43.815 72.898,43.815 69.85,44.323 70.358,44.323 70.866,44.323 71.374,44.323 71.882,44.323 72.39,44.323 72.898,44.323 69.85,44.831 70.358,44.831 70.866,44.831 71.374,44.831 71.882,44.831 72.39,44.831 69.85,45.339 70.358,45.339 70.866,45.339 71.374,45.339 71.882,45.339 72.39,45.339 72.898,45.339 69.85,45.847 70.358,45.847 70.866,45.847 71.374,45.847 71.882,45.847 72.39,45.847 72.898,45.847 69.85,46.355 70.358,46.355 70.866,46.355 71.374,46.355 71.882,46.355 72.39,46.355 72.898,46.355
  other v2: 66.167,1.524 82.199,2.518 60.325,2.794 63.516,3.073 69.484,3.73 76.835,3.81 75.438,4.953 78.453,5.05 65.033,5.349 82.511,5.674 76.327,5.842 68.707,6.35 53.467,6.477 61.722,7.112 65.786,8.89 56.63,9.163 63.754,9.525 49.657,10.287 52.07,11.176 47.141,11.833 68.58,11.938 81.471,12.195 70.739,12.954 46.985,13.571 81.366,14.727 46.99,15.24 82.893,15.837 68.834,16.383 81.297,16.773 47.498,16.891 82.423,17.526 53.293,17.689 47.244,17.78 68.372,18.095 70.85,18.196 79.528,18.23 59.69,18.288 80.899,19.05 61.087,19.304 59.944,19.685 51.689,19.939 50.292,20.193 59.852,20.808 82.338,21.074 83.312,21.082 51.562,22.352 47.244,22.479 81.661,22.479 53.975,24.257 57.277,24.511 69.215,26.543 47.244,26.924 47.244,29.845 47.117,31.496 76.073,31.75 46.99,33.274 47.126,36.234 82.408,38.196 79.502,38.227 76.581,38.354 61.595,42.164 60.071,42.418 68.453,42.799 54.102,44.196 60.132,44.23 62.966,44.488 54.61,45.72 47.292,46.449 61.468,46.482 59.944,46.736 45.339,46.863 64.897,47.244 68.58,47.244 52.832,47.371
HS1: C13.2 D1.1 Q1.1 R5.2 | length 11.8
  Top Layer w0.635: Q1.1 14.351,10.172 14.723,10.544 C13.2 16.071,10.552 16.071,11.938 ; D1.1 16.071,12.947 16.071,11.938 ; R5.2 20.95,11.933 18.547,11.933 18.542,11.938 16.071,11.938
HS2: C14.1 D4.1 Q2.1 R12.2 | length 11.5
  Top Layer w0.635: C14.1 19.558,37.973 ; Q2.1@19.431,40.508 Q2.1 19.558,40.894 19.558,40.508 19.558,37.973 ; R12.2 24.013,36.83 24.008,36.825 21.519,36.825 20.529,37.815 20.396,37.948 D4.1 19.558,37.973
IO: JP1.2 U4.34 | length 10.6
  Top Layer w0.229: v2(68.072,21.971) 68.072,21.816 68.425,21.463 U4.34
  Bottom Layer w0.229: v2(68.072,21.971) 70.993,21.971 72.136,23.114 JP1.2
LS1: C19.1 D3.1 Q3.1 R7.2 | length 15.4
  Top Layer w0.635: Q3.1 33.655,10.166 34.027,10.538 C19.1 35.659,10.82 35.659,11.402 36.195,11.938 D3.1 39.065,11.913 40.31,10.668 43.443,10.668 43.815,11.04 43.815,11.799 R7.2 43.802,11.811 43.644,11.653 R7.2@43.644,11.628
LS2: C20.1 D6.1 Q4.1 R13.2 | length 11.2
  Top Layer w0.635: C20.1 35.618,37.848 37.793,37.848 D6.1 ; Q4.1 38.735,38.811 37.795,37.871 D6.1 ; R13.2 42.557,36.703 38.938,36.703 37.952,37.688 37.928,37.688 37.795,37.821 D6.1
MISO: U4.16
MOSI: JP2.6 U4.17 | length 8.5
  Top Layer w0.229: JP2.6 57.658,28.321 58.42,27.559 58.42,26.416 59.695,25.141 62.43,25.141 U4.17
NetC2_1: C2.1 C3.2 D2.2 U1.8 | length 7.6
  Top Layer w0.635: C2.1@42.672,7.505 42.774,7.403 44.344,7.403 44.447,7.301 44.547,7.301 45.353,6.495 47.114,6.495 47.149,6.459 D2.2@47.149,3.81
NetC17_1: C17.1 IC1.8 RF2.1 RF3.1 | length 4.7
  Top Layer w0.635: IC1.8 38.01,26.791 42.666,26.791 RF3.1
NetC22_2: C22.2 C23.2 D5.2 U3.8 | length 7.7
  Top Layer w0.635: C22.2 43.659,41.16 44.179,40.64 U3.8 47.197,40.64 47.276,40.561 D5.2
NetC24_1: C24.1 IC1.1 R2_b.2 RF1.1 | length 8.1
  Top Layer w0.635: R2_b.2 31.42,27.166 31.789,26.797 IC1.1 32.354,29.052 32.893,29.591 RF1.1
NetC24_2: C24.2 IC1.2 R2_a.2 R2_b.1 | length 5.2
  Top Layer w0.635: R2_a.2 27.287,25.545 32.336,25.545 IC1.2
NetC31_2: C31.2 U4.5 XT1.1 | length 9.6
  Top Layer w0.229: U4.5 67.432,28.629 67.432,29.907 68.348,30.823 69.304,30.823 69.723,31.242 69.723,32.766 70.714,33.757 71.514,33.757 XT1.1
  Top Layer w0.635: XT1.1 71.806,33.683 72.683,33.683 72.95,33.416 C31.2
NetC32_2: C32.2 U4.6 XT1.3 | length 5
  Top Layer w0.229: U4.6 66.925,30.047 67.823,30.945 XT1.3
  Top Layer w0.635: C32.2 66.496,32.116 66.763,31.848 67.641,31.848 XT1.3
NetC35_2: C35.2 IC1.3 R1_a.2 R1_b.2 | length 5.3
  Top Layer w0.635: R1_a.2@27.166,24.003 27.191,24.003 27.445,24.257 IC1.3
NetD1_2: D1.2 R2.2 | length 2.1
  Top Layer w0.635: D1.2 19.228,12.979 19.711,13.462 R2.2
NetD3_2: D3.2 R8.2 | length 2.7
  Top Layer w0.635: D3.2 42.291,12.014 42.291,12.954 42.672,13.335 R8.2
NetD4_2: D4.2 R11.2 | length 2
  Top Layer w0.635: D4.2 23.546,37.998 23.678,38.131 23.954,38.131 24.05,38.227 R11.2
NetD6_2: D6.2 R14.2 | length 1.9
  Top Layer w0.635: D6.2 40.945,37.871 41.301,38.227 R14.2
NetH1_2: H1.2 Q5.3 | length 4.8
  Top Layer w0.635: Q5.3 78.593,34.056 79.375,33.274 H1.2
NetL3_1: L3.1 R25.2 | length 1.4
  Top Layer w0.635: L3.1 R25.2
NetLS1_2: LS1.2 Q6.3 | length 3.9
  Top Layer w0.635: Q6.3 78.609,32.11 78.609,28.21 LS1.2
NetNT1_1: NT1.1 R6.2 VOUT1.2 | length 15.6
  Top Layer w1.524: VOUT1.2 6.092,39.243 9.804,35.531 R6.2
NetQ5_1: Q5.1 R16.2 | length 1.8
  Top Layer w0.635: R16.2 74.422,36.589 74.606,36.773 75.991,36.773 Q5.1
NetQ6_1: Q6.1 R26.2 | length 1.8
  Top Layer w0.635: R26.2 74.517,32.976 76.004,32.976 Q6.1
NetR2_1: R2.1 R5.1 U1.7 | length 30.9
  Top Layer w0.635: R2.1 R5.1 22.582,9.422 27.051,4.953 v2(40.202,4.953)
  Bottom Layer w0.635: v2(40.202,4.953) 43.688,4.953 v2(46.482,7.747)
NetR7_1: R7.1 R8.1 U1.5 | length 3.9
  Top Layer w0.635: R8.1 R7.1 45.352,11.811 45.88,11.283 45.88,10.305 45.897,10.287 U1.5
NetR11_1: R11.1 R12.1 U3.7 | length 25.7
  Top Layer w0.635: R12.1 26.906,36.836 R11.1@26.906,38.221 ; R11.1@26.937,38.227 R11.1 26.912,41.263 29.21,43.561 v2(41.148,43.561) ; v2(45.974,41.91) U3.7
  Bottom Layer w0.635: v2(41.148,43.561) 44.323,43.561 v2(45.974,41.91)
NetR13_1: R13.1 R14.1 U3.5 | length 8.9
  Top Layer w0.635: R13.1 v2(44.184,38.227)
  Bottom Layer w0.635: v2(44.184,38.227) 47.244,41.287 v2(47.244,44.45)
NetR22_1: R22.1 U4.44 | length 3.3
  Top Layer w0.229: U4.44 74.156,25.134 R22.1
NetR25_1: R25.1 U4.2 | length 18.4
  Top Layer w0.229: U4.2 68.932,28.615 68.932,27.588 69.091,27.429 69.717,27.429 69.918,27.63 69.918,28.389 70.485,28.956 72.898,28.956 v2(73.66,28.194) ; R25.1 v2(81.534,30.353)
  Bottom Layer w0.229: v2(73.66,28.194) 73.66,29.083 74.93,30.353 v2(81.534,30.353)
NetR28_2: R28.2 U4.20 | length 9.6
  Top Layer w0.229: R28.2@53.721,21.578 53.721,21.603 54.082,21.964 54.107,21.964 54.114,21.971 58.166,21.971 59.829,23.634 U4.20
PGND: C19.2 C20.2 C33.2 C34.2 NT2.1 NT3.1 Q3.3 Q4.3 R6.1 VIN1.1 | length 147.3
  Top Layer w0.635: VIN1.1 6.092,9.398 14.093,17.399 NT3.1 ; Q4.3 33.686,40.99 33.686,37.88 C20.2 ; C19.2 38.363,10.538 38.735,10.166 Q3.3
  Bottom Layer w1.524: C34.2 3.27,27.051 3.27,26.543 v1@3.27,25.781 ; VIN1.1 5.842,16.605 5.382,17.066 4.558,17.889 4.558,18.939 4.51,18.987 3.46,18.987 C33.2 3.27,24.003 3.27,24.511 3.27,25.019 v1@3.27,25.781 ; Q4.3 33.655,40.767 33.528,40.64 33.274,40.64 32.004,39.37 32.004,29.083 28.702,25.781 ; Q3.3 38.735,8.001 41.148,10.414 41.148,24.888 40.255,25.781 28.702,25.781 ; v1@3.27,25.781 3.429,25.781 3.937,25.781 4.445,25.781 28.702,25.781
  other v1: 1.905,24.003 2.413,24.003 2.921,24.003 3.429,24.003 3.937,24.003 4.445,24.003 1.905,24.511 2.413,24.511 2.921,24.511 3.429,24.511 3.937,24.511 4.445,24.511 1.905,25.019 2.413,25.019 2.921,25.019 3.429,25.019 3.937,25.019 4.445,25.019 1.905,25.527 2.413,25.527 2.921,25.527 3.429,25.527 3.937,25.527 4.445,25.527 1.905,26.035 2.413,26.035 2.921,26.035 3.429,26.035 3.937,26.035 4.445,26.035 1.905,26.543 2.413,26.543 2.921,26.543 3.429,26.543 3.937,26.543 4.445,26.543 1.905,27.051 2.413,27.051 2.921,27.051 3.429,27.051 3.937,27.051 4.445,27.051
RESET: R27.1 U4.7 | length 13.3
  Top Layer w0.229: v2(63.5,33.909) 63.609,33.8 63.876,33.8 64.643,33.033 R27.1 ; U4.7 66.425,27.301 v2(67.056,26.67)
  Bottom Layer w0.229: v2(63.5,33.909) 63.5,28.702 65.045,27.157 66.493,27.157 66.98,26.67 v2(67.056,26.67)
RST: JP2.4 U4.19 | length 6.9
  Top Layer w0.229: JP2.4 58.42,23.241 59.313,24.134 U4.19
SCK: JP2.7 U4.15 | length 10.3
  Top Layer w0.229: JP2.7 58.166,30.861 59.055,29.972 59.055,26.924 59.845,26.134 U4.15
SO1_N: NT2.2 R2_a.1 | length 23.9
  Top Layer w0.229: NT2.2 5.969,24.638 5.969,22.733 v2(6.223,22.479) ; v2(8.89,22.479) 18.542,22.479 21.717,25.654 R2_a.1
  Bottom Layer w0.229: v2(6.223,22.479) v2(8.89,22.479)
SO1_P: NT1.2 R1_a.1 | length 23.5
  Top Layer w0.229: NT1.2 7.246,25.273 7.112,25.139 7.112,22.225 7.62,21.717 20.32,21.717 22.733,24.13 R1_a.1
temp: C25.2 NTC1.2 R15.2 U4.13 | length 17.2
  Top Layer w0.229: C25.2 56.007,37.809 58.82,34.996 59.492,34.996 v2(59.563,34.925) ; v2(59.944,29.21) 59.944,28.927 61.737,27.134 U4.13
  Top Layer w0.635: R15.2 54.337,39.236 54.337,37.935 NTC1.2 54.358,37.875 55.966,37.875 C25.2
  Bottom Layer w0.229: v2(59.563,34.925) 59.563,29.63 59.944,29.249 v2(59.944,29.21)
TIM1_CH1: U1.2 U4.29 | length 22
  Top Layer w0.229: v2(63.373,14.478) 63.373,16.637 65.689,18.953 65.717,18.953 65.918,19.154 65.918,20.139 U4.29
  Bottom Layer w0.229: v2(50.927,7.747) 56.642,7.747 v2(63.373,14.478)
TIM1_CH1N: U1.3 U4.26 | length 19
  Top Layer w0.229: v2(60.577,14.86) 60.58,14.86 64.425,18.705 U4.26
  Bottom Layer w0.229: v2(50.927,9.017) 54.737,9.017 60.577,14.857 v2(60.577,14.86)
TIM1_CH2: U3.2 U4.30 | length 31
  Top Layer w0.229: U3.2 56.642,41.91 61.087,37.465 v2(61.087,34.798) ; v2(66.421,21.971) 66.423,21.969 66.423,20.148 U4.30
  Bottom Layer w0.229: v2(61.087,34.798) 61.087,33.274 62.992,31.369 62.992,28.321 66.421,24.892 v2(66.421,21.971)
TIM1_CH2N: U3.3 U4.27 | length 31.5
  Top Layer w0.229: U3.3 52.832,43.18 53.467,42.545 57.023,42.545 61.976,37.592 v2(61.976,31.115) ; v2(64.913,21.574) 64.919,21.568 64.919,20.152 U4.27
  Bottom Layer w0.229: v2(61.976,31.115) 61.976,28.575 64.913,25.638 v2(64.913,21.574)
V_IN: C4.1 C5.1 C6.1 C33.1 Q1.2 R20.1 U2.1 VIN1.2 | length 99.6
  Top Layer w0.635: v1(12.319,19.304) 48.006,19.304 54.61,12.7 C4.1 C5.1 C6.1 58.862,10.783 59.055,10.977 59.055,12.573 59.436,12.954 R20.1
  Top Layer w1.524: Q1.2@16.891,2.667 Q1.2@16.891,7.747
  Bottom Layer w0.635: C33.1 12.192,19.177 v1(12.319,19.304)
  Bottom Layer w1.524: VIN1.2 6.08,4.556 8.493,4.556 11.97,8.033 C33.1 ; C33.1@12.192,19.177 15.748,19.177 16.382,18.543 16.891,18.034 16.891,7.747 Q1.2@16.891,3.556
  other v1: 8.758,19.306 9.266,19.306 9.774,19.306 10.282,19.306 10.79,19.306 11.298,19.306 11.806,19.306 12.822,19.306 13.33,19.306
V_OUT: C34.1 Q2.2 R21.1 VOUT1.1 | length 62.1
  Top Layer w0.229: v2(15.875,30.988) 16.256,31.369 39.116,31.369 41.879,34.132 R21.1@42.399,34.132
  Bottom Layer w0.635: C34.1 v2(15.875,30.988)
  Bottom Layer w1.524: VOUT1.1 11.43,44.323 ; C34.1 11.668,30.988 11.43,31.226 11.43,44.323 ; Q2.2@16.891,40.513 16.891,45.593 16.616,45.593 15.346,44.323 11.43,44.323
vin_sense: C29.2 R20.2 R23.1 U4.11 | length 18
  Top Layer w0.229: v2(64.135,22.987) 64.425,23.277 U4.11 ; 64.897,13.652 v2(64.897,15.621)
  Top Layer w0.635: R20.2 R23.1 64.897,13.652
  Bottom Layer w0.229: v2(64.135,22.987) 64.135,16.383 v2(64.897,15.621)
vout_sense: C30.2 R21.2 R24.1 U4.10 | length 28.3
  Top Layer w0.229: R21.2 44.082,34.29 44.971,35.179 57.785,35.179 59.817,33.147 59.817,32.131 61.957,29.991 64.541,29.991 64.918,29.614 64.918,28.629 U4.10
  Top Layer w0.635: C30.2 44.051,31.121 44.051,32.766 44.051,34.284 R21.2
VS1: C2.2 C3.1 C13.1 L1.1 Q1.3 Q3.2 U1.6 | length 71.7
  Top Layer w0.635: C13.1 19.059,10.544 19.431,10.172 Q1.3 ; Q3.2@36.195,2.667 39.878,2.667 41.148,3.937 41.148,8.636 41.523,9.011 46.541,9.011 U1.6
  Top Layer w1.524: Q1.3 24.511,2.667 Q3.2@36.195,2.667
  Bottom Layer w1.524: Q1.3@19.431,8.636 19.431,13.335 20.784,14.688 35.941,14.688 36.195,14.434 36.195,7.747 Q3.2@36.195,3.556
VS2: C14.2 C22.1 C23.1 L1.2 Q2.3 Q4.2 U3.6 | length 66.4
  Top Layer w0.635: Q2.3 14.224,40.894 14.224,38.345 14.596,37.973 C14.2 ; Q4.2@36.195,46.101 42.164,46.101 43.558,44.707 C23.1@43.558,42.856 ; C22.1 43.659,42.66 44.179,43.18 U3.6
  Bottom Layer w1.524: Q2.3@14.351,40.513 14.351,36.576 16.339,34.588 24.888,34.588 25.781,35.481 25.781,43.688 27.686,45.593 36.195,45.593 36.195,41.021 L1.2@36.195,34.036
pads on no net: IC1.5 IC1.6 IC1.7 SW1.S1 SW1.S2 U2.0 U4.1 U4.14 U4.22 U4.25 U4.28 U4.31 U4.32 U4.33 U4.36 U4.41 U4.42 U4.43 U4.45 U4.46

## Polygon pours and split planes (outlines as drawn)
GND on Bottom Layer "NONET_L-01_P-001" (solid, pour order 12): 46.482,48.006 46.482,0.508 84.074,0.508 84.074,48.006
VS2 on Bottom Layer "VS2_L02_P007" (solid, pour order 7): 40.64,48.006 40.64,31.115 12.954,31.115 12.954,48.006
V_OUT on Bottom Layer "V_OUT_L02_P006" (solid, pour order 6): 0.508,48.006 0.508,40.894 8.509,40.894 8.509,28.956 9.652,27.813 21.59,27.813 22.86,29.083 22.86,31.877 15.748,31.877 12.954,34.671 12.954,42.672 13.589,43.307 15.24,43.307 15.875,42.672 15.875,39.116 16.637,38.354 18.669,38.354 22.606,42.291 22.606,48.006
PGND on Bottom Layer "PGND_L02_P002" (solid, pour order 2): 40.64,5.588 37.719,5.588 37.592,5.715 37.592,11.303 38.989,12.7 38.989,21.082 38.608,21.463 8.128,21.463 7.239,20.574 7.239,7.62 0.508,7.62 0.508,33.401 6.35,33.401 7.366,32.385 7.366,28.067 8.636,26.797 25.908,26.797 28.702,29.591 28.702,41.148 31.115,43.561 34.417,43.561 34.798,43.18 34.798,37.719 33.528,36.449 33.528,31.623 34.544,30.607 41.021,30.607 44.831,26.797 44.831,7.239 43.18,5.588
VS1 on Bottom Layer "NONET_L-01_P-001" (solid, pour order 1): 18.415,5.588 18.415,20.701 38.481,20.701 38.481,12.827 37.211,11.557 37.211,5.08 38.735,3.556 38.735,0.508 23.495,0.508 21.717,2.286
V_IN on Bottom Layer "NONET_L-01_P-001" (solid, pour order 0): 0.508,6.477 0.508,0.508 20.066,0.508 20.066,2.921 17.907,5.08 17.907,20.701 8.382,20.701 8.382,7.493 7.366,6.477
GND on Top Layer "NONET_L-01_P-001" (solid, pour order 13): 84.074,48.006 44.323,48.006 44.323,30.48 19.177,30.48 19.177,21.717 44.958,21.717 44.958,0.508 84.074,0.508
+12 on Top Layer "NONET_L-01_P-001" (solid, pour order 11): 64.897,41.402 73.279,41.402 73.533,41.148 73.533,35.941 73.406,35.814 64.897,35.814
GND on Top Layer "GND_L01_P003" (solid, pour order 3): 64.897,47.244 64.897,43.18 73.787,43.18 73.787,47.244
V_IN on Top Layer "V_IN_L01_P010" (solid, pour order 10): 8.382,18.923 47.498,18.923 53.848,12.573 53.848,10.541 54.102,10.287 61.722,10.287 62.23,10.795 62.23,13.716 61.849,14.097 54.356,14.097 47.484,20.969 8.396,20.969 8.382,20.955
V_IN on Top Layer "V_IN_L01_P009" (solid, pour order 9): 0.508,6.477 17.907,6.477 17.907,5.08 20.066,2.921 20.066,0.508 0.508,0.508
V_OUT on Top Layer "V_OUT_L01_P008" (solid, pour order 8): 0.508,48.006 0.508,42.164 22.606,42.164 22.606,48.006
PGND on Top Layer "PGND_L01_P005" (solid, pour order 5): 0.508,27.686 5.334,27.686 5.334,20.574 7.239,20.574 7.239,7.62 0.508,7.62
NetNT1_1 on Top Layer "NETNT1_1_L01_P004" (solid, pour order 4): 7.62,23.368 7.62,28.829 0.508,28.829 0.508,41.529 12.7,41.529 12.7,23.368

## Keep-outs
Keep-Out Layer:
  the board outline again, w0.889

## Text inside footprints (layer, text, board x,y; h text height)
LS1: Bottom Overlay "+" at 77.902,21.984 h1.52 r270